# Altium PCB LEDArray8KeyRevB.PcbDoc (part 1 of 4)
Units mm, origin at the board's own origin, x right, y up, seen from the top; angles counter-clockwise.
Board outline 120 x 84.91 mm, 2 copper layers (Top Layer, Bottom Layer); 250 components, 219 nets, 891 pads, 234 vias.
Unrouted connection lines stored in the file: 34.
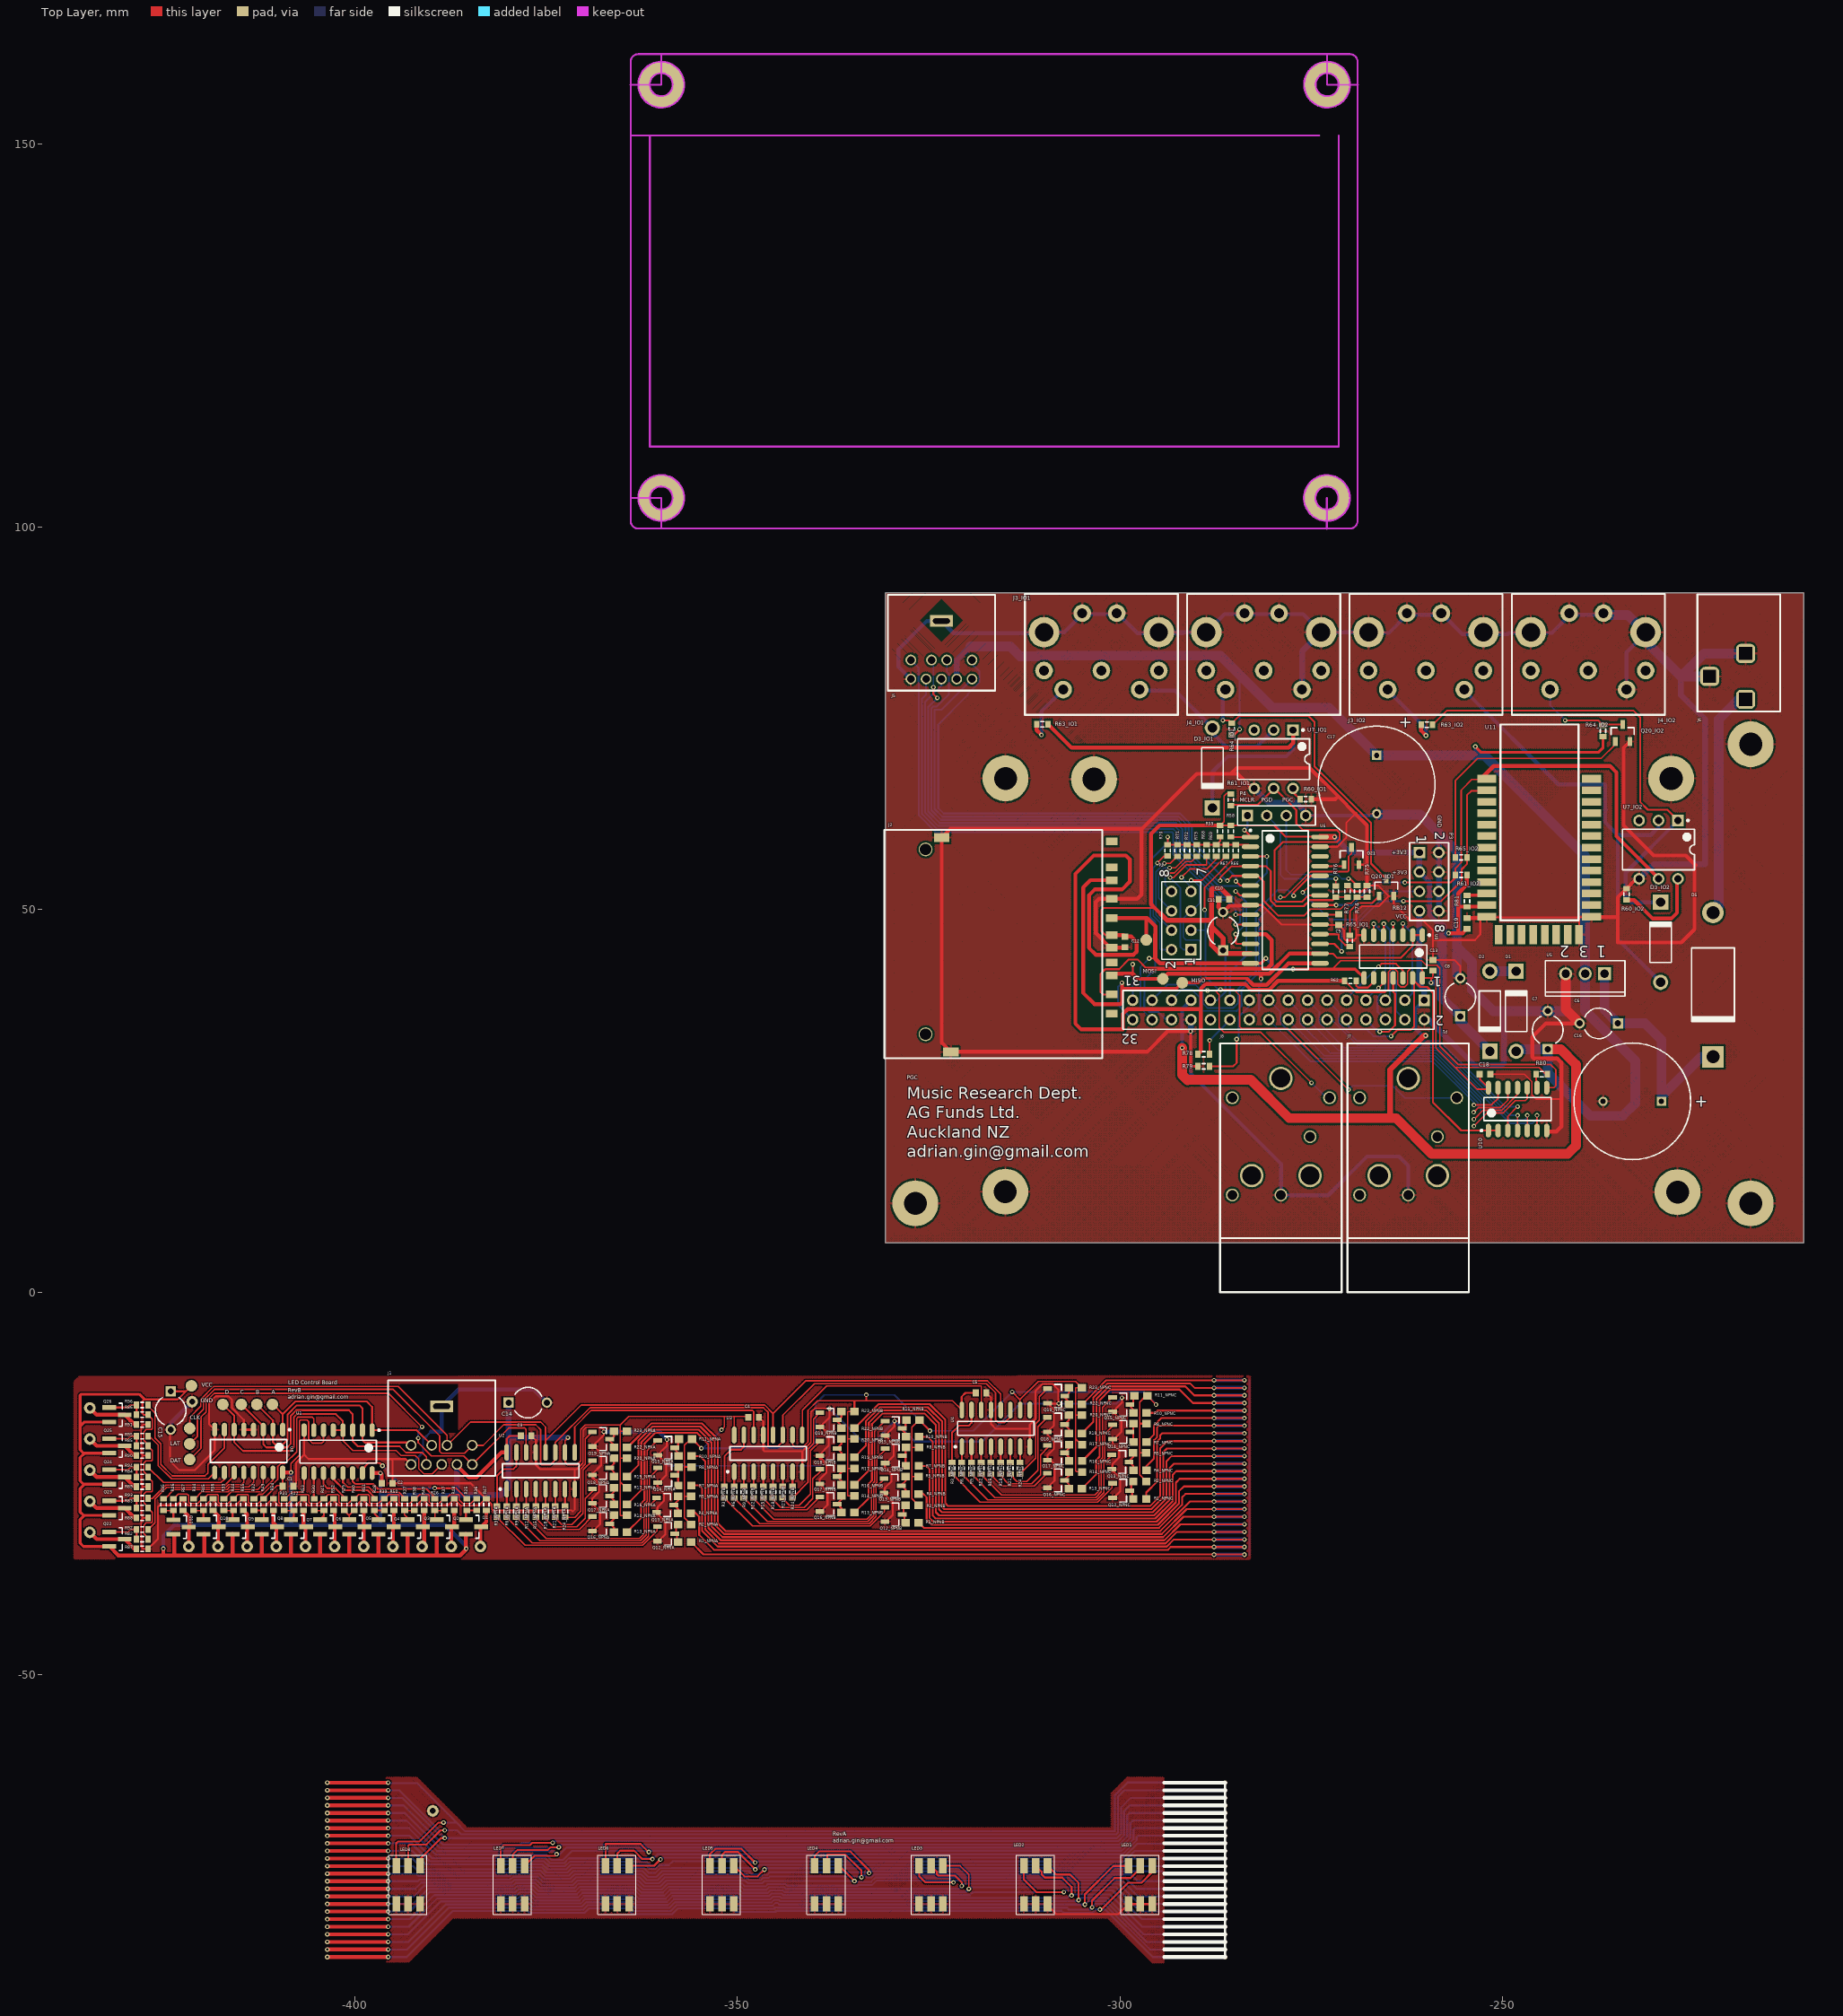
[diagram p0: Top Layer view]
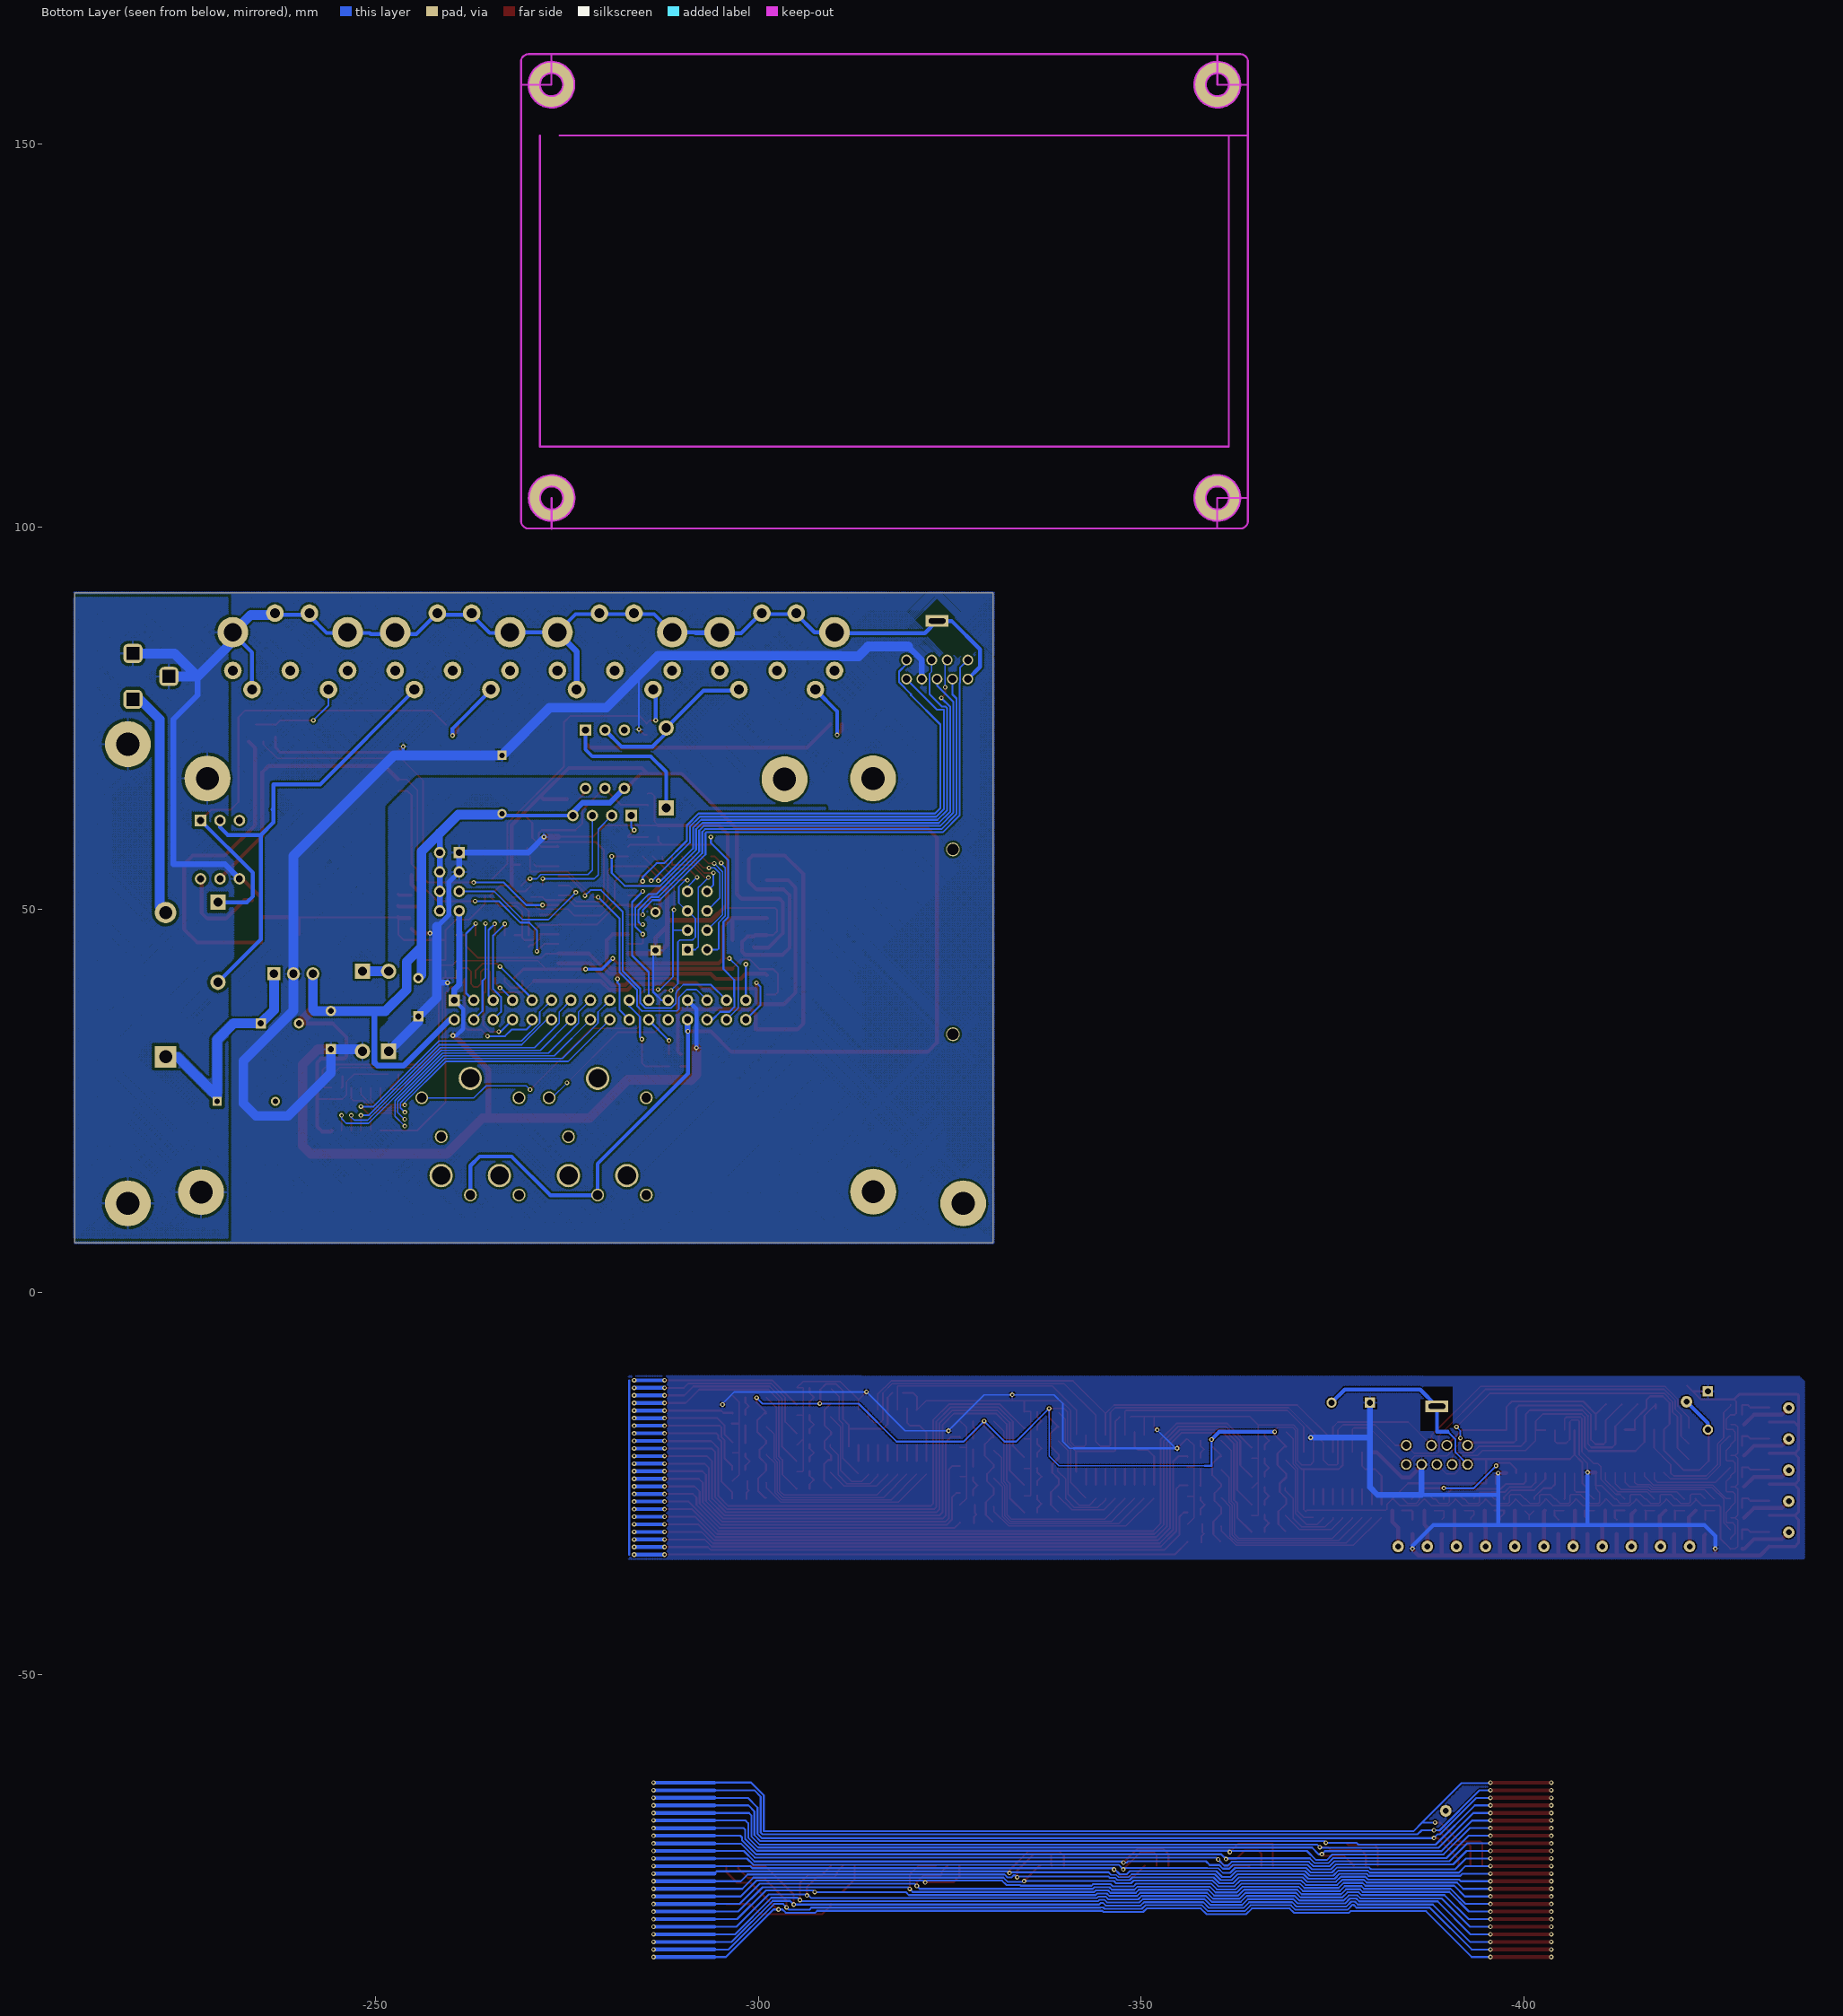
[diagram p1: Bottom Layer view, seen from below]

## Layer stack, top to bottom
Top Layer: signal copper 0.0356
Dielectric: prepreg 0.32, FR-4, Dk 4.8
Bottom Layer: signal copper 0.0356

## Board outline
-330.656,6.485 -210.656,6.485 -210.656,91.398 -330.656,91.398

## Design rules (kind name [scope] priority, off if disabled: settings)
Clearance Clearance_3 [InNamedPolygon('MB_3V3_B') Or  InNamedPolygon('MB_VCC_B') Or  InNamedPolygon('MB_GND_T') Or  InNamedPolygon('MB_VIN_B')] p1: gap=0.254
Clearance Clearance_2 [InNamedPolygon('MB_VCC_B') Or  InNamedPolygon('MB_VIN_B') Or  InNamedPolygon('MB_GND_T') Or  InNamedPolygon('MB_3V3_B')] p2: gap=0.381
Clearance Clearance_1 [InNamedPolygon('Top Layer-No Net') Or  InNamedPolygon('Top Layer-No Net') Or  InNamedPolygon('MB_GND_B') Or  InNamedPolygon('Top Layer-No Net') Or  InNamedPolygon('MB_VCC_B') Or  InNamedPolygon('GNDBOT') Or  InNamedPolygon('MB_3V3_B') Or  InNamedPolygon('tedi') Or  InNamedPolygon('Top Layer-No Net') Or  InNamedPolygon('VCCBOT')] p3: gap=0.381
Clearance [All] p4: gap=0.152
HoleSize [All] p1: absolutevalues=TRUE maxlimit=5.08 minlimit=0.3 maxpercent=80.000 minpercent=20.000
HoleToHoleClearance [All] p1: gap=0.076 allowstackedmicrovias=TRUE
MinimumAnnularRing [All] p1: minimumring=0.102
MinimumSolderMaskSliver [All] p1: minsoldermaskwidth=0.1
PolygonConnect [All] p1: connectstyle=Relief reliefconductorwidth=0.254 reliefentries=4 polygonreliefangle="90 Angle"
RoomDefinition LEDArray [InComponentClass('LEDArray')] p1: confinementstyle=ConfineIn formatcopy=TRUE lockcomponents=FALSE outline -433.742,-34.562 -433.742,-13.698 -426.382,-13.698 -426.382,-11.944 -396.003,-11.944 -396.003,-11.117 -381.241,-11.117 -381.241,-12.065 -373.858,-12.065 -373.858,-12.295 -316.648,-12.295 -316.648,-13.727 -310.664,-13.727 -310.664,-21.835 -340.4,-21.835 -340.4,-25.101 -370.129,-25.101 -370.129,-27.373 -381.742,-27.373 -381.742,-32.953 -419.969,-32.953 -419.969,-32.979 -426.232,-32.979 -426.232,-34.382 -428.334,-34.382 -428.334,-34.562
RoomDefinition IO2 [InComponentClass('IO2')] p2: confinementstyle=ConfineIn formatcopy=TRUE lockcomponents=FALSE outline -270.373,74.959 -270.373,91.521 -228.402,91.521 -228.402,62.734 -224.579,62.734 -224.579,52.954 -232.97,52.954 -232.97,50.498 -234.678,50.498 -234.678,51.284 -238.245,51.284 -238.245,53.688 -256.918,53.688 -256.918,73.3 -261.395,73.3 -261.395,74.959
RoomDefinition PowerSupply [InComponentClass('PowerSupply')] p3: confinementstyle=ConfineIn formatcopy=TRUE lockcomponents=FALSE outline -257.895,35.046 -257.895,42.056 -253.423,42.056 -253.423,43.28 -244.777,43.28 -244.777,45.694 -225.675,45.694 -225.675,51.341 -224.934,51.341 -224.934,91.557 -213.372,91.557 -213.372,75.495 -219.367,75.495 -219.367,29.041 -223.526,29.041 -223.526,16.977 -241.036,16.977 -241.036,30.159 -253.423,30.159 -253.423,35.046
RoomDefinition MainBoard [InComponentClass('MainBoard')] p4: confinementstyle=ConfineIn formatcopy=TRUE lockcomponents=FALSE outline -331.172,30.186 -331.172,60.798 -330.71,60.798 -330.71,91.499 -315.948,91.499 -315.948,74.996 -258.489,74.996 -258.489,74.481 -238.14,74.481 -238.14,45.55 -242.851,45.55 -242.851,19.431 -254.019,19.431 -254.019,-0.369 -287.293,-0.369 -287.293,26.981 -296.655,26.981 -296.655,30.186
RoomDefinition IO1 [InComponentClass('IO1')] p5: confinementstyle=ConfineIn formatcopy=TRUE lockcomponents=FALSE outline -312.803,75.064 -312.803,91.626 -270.832,91.626 -263.139,91.626 -263.139,55.145 -263.139,50.637 -269.109,50.637 -269.109,44.402 -270.817,44.402 -270.817,61.952 -289.68,61.952 -289.68,73.373 -311.64,73.373 -311.64,75.064
RoomDefinition NPNB [InComponentClass('NPNB')] p6: confinementstyle=ConfineIn formatcopy=TRUE lockcomponents=FALSE outline -352.569,-32.707 -322.343,-32.707 -322.343,-13.911 -352.569,-13.911
RoomDefinition NPNC [InComponentClass('NPNC')] p7: confinementstyle=ConfineIn formatcopy=TRUE lockcomponents=FALSE outline -322.83,-29.593 -292.604,-29.593 -292.604,-10.797 -322.83,-10.797
RoomDefinition NPNA [InComponentClass('NPNA')] p8: confinementstyle=ConfineIn formatcopy=TRUE lockcomponents=FALSE outline -382.287,-35.247 -352.061,-35.247 -352.061,-16.451 -382.287,-16.451
RoomDefinition LED1 [InComponentClass('LED1')] p9: confinementstyle=ConfineIn formatcopy=TRUE lockcomponents=FALSE outline -395.864,-81.584 -395.864,-73.226 -294.587,-73.226 -294.587,-81.584
RoutingVias [All] p1: holewidth=0.28 width=0.6 viastyle="Through Hole" minholewidth=0.2 minwidth=0.5 maxholewidth=1.524 maxwidth=1.524
SilkToSilkClearance [All] p1: silktosilkclearance=0.152
SilkscreenOverComponentPads [All] p1: minsilkscreentomaskgap=0.076
SolderMaskExpansion [All] p1: expansion=0.076
Width [All] p1: maxlimit=10 minlimit=0.152 preferedwidth=0.254 minimp=50.000000 maximp=50.000000 favimp=50.000000
23 further rules are at their usual default settings.

## Classes and differential pairs
component class MainBoard: C9 C10 C11 C12 C13 C17 C18 C19 J2 J5 J7 J8 P1 P2 P3 P4 Q21 R58 R59 R62 R66 R67 R68 R69 R70 R71 R72 R73 R74 R75 R76 R77 R78 R79 R80 R81 U6 U9 U10 U11
net class L[1..24]: L1 L2 L3 L4 L5 L6 L7 L8 L9 L10 L11 L12 L13 L14 L15 L16 L17 L18 L19 L20 L21 L22 L23 L24
net class COM[1..8]: COM1 COM2 COM3 COM4 COM5 COM6 COM7 COM8 COM9 COM10 COM11 COM12 COM13 COM14 COM15 COM16
component class LED1: LED1 LED2 LED3 LED4 LED5 LED6 LED7 LED8
channel class NPNTransistorArray: NPNA NPNB NPNC
component class LEDArray: Adrian C1 C2 C3 C4 C5 C14 C15 J1 Q1 Q2 Q3 Q4 Q5 Q6 Q7 Q8 Q9 Q10 Q11 Q22 Q23 Q24 Q25 Q26 R25 R26 R27 R28 R29 R30 R31 R32 R33 R34 R35 R36 R37 R38 R39 R40 R41 R42 R43 R44 R45 R46 R47 R48 R49 R50 R51 R52 R53 R54 R55 R56 R57 R82 R83 R84 R85 R86 R87 R88 R89 R90 R91 R92 R93 R94 R95 R96 U1 U2 U3 U4 U8
component class NPNA: Q12_NPNA Q13_NPNA Q14_NPNA Q15_NPNA Q16_NPNA Q17_NPNA Q18_NPNA Q19_NPNA R1_NPNA R2_NPNA R3_NPNA R4_NPNA R5_NPNA R6_NPNA R7_NPNA R8_NPNA R9_NPNA R10_NPNA R11_NPNA R12_NPNA R13_NPNA R14_NPNA R15_NPNA R16_NPNA R17_NPNA R18_NPNA R19_NPNA R20_NPNA R21_NPNA R22_NPNA R23_NPNA R24_NPNA
component class NPNB: Q12_NPNB Q13_NPNB Q14_NPNB Q15_NPNB Q16_NPNB Q17_NPNB Q18_NPNB Q19_NPNB R1_NPNB R2_NPNB R3_NPNB R4_NPNB R5_NPNB R6_NPNB R7_NPNB R8_NPNB R9_NPNB R10_NPNB R11_NPNB R12_NPNB R13_NPNB R14_NPNB R15_NPNB R16_NPNB R17_NPNB R18_NPNB R19_NPNB R20_NPNB R21_NPNB R22_NPNB R23_NPNB R24_NPNB
component class NPNC: Q12_NPNC Q13_NPNC Q14_NPNC Q15_NPNC Q16_NPNC Q17_NPNC Q18_NPNC Q19_NPNC R1_NPNC R2_NPNC R3_NPNC R4_NPNC R5_NPNC R6_NPNC R7_NPNC R8_NPNC R9_NPNC R10_NPNC R11_NPNC R12_NPNC R13_NPNC R14_NPNC R15_NPNC R16_NPNC R17_NPNC R18_NPNC R19_NPNC R20_NPNC R21_NPNC R22_NPNC R23_NPNC R24_NPNC
component class PowerSupply: C6 C7 C8 C16 D1 D2 D5 J6 U5
component class IO1: D3_IO1 J3_IO1 J4_IO1 Q20_IO1 R60_IO1 R61_IO1 R63_IO1 R64_IO1 R65_IO1 U7_IO1
component class IO2: D3_IO2 J3_IO2 J4_IO2 Q20_IO2 R60_IO2 R61_IO2 R63_IO2 R64_IO2 R65_IO2 U7_IO2
channel class MIDIInterface: 1 2
net class RX[1..2]: RX1 RX2
net class TX[1..2]: TX1 TX2

## Components (designator, comment, footprint, x,y, rotation, side; value= is the part's Value field where it differs from the comment)
C1 "Cap Semi" 1608[0603] -408.703,-25.341 r0 top
C2 "Cap Semi" 1608[0603] -395.749,-24.96 r0 top
C3 "Cap Semi" 1608[0603] -377.588,-18.747 r180 top
C4 "Cap Semi" 1608[0603] -347.87,-16.324 r180 top
C5 "Cap Semi" 1608[0603] -318.152,-13.149 r180 top
C6 "Cap2" CAPR5-4X5 -237.445,35.138 r180 top
C7 "Cap2" CAPR5-4X5 -244.111,34.255 r90 top
C8 "Cap2" CAPR5-4X5 -255.541,38.551 r90 top
C9 "Cap Semi" 1608[0603] -271.416,48.7 r90 top
C10 "Cap Semi" 1608[0603] -286.402,51.367 r0 top
C11 "Cap2" CAPR5-4X5 -286.529,47.176 r90 top
C12 "Cap Semi" 1608[0603] -299.356,45.779 r90 top
C13 "Cap Semi" 1608[0603] -259.097,42.731 r270 top
C14 "Cap2" CAPR5-4X5 -377.363,-14.419 r0 top
C15 "Cap2" CAPR5-4X5 -424.028,-15.449 r270 top
C16 "Cap Pol1" RB7.6-15 -233.062,24.951 r0 top
C17 "Cap Pol1" RB7.6-15 -266.463,66.353 r90 top
C18 "Cap Semi" 1608[0603] -252.315,28.507 r180 top
C19 "Cap Semi" 1608[0603] -254.652,48.192 r270 top
D1 "Diode 1N4004" DO-41 -248.24,36.72 r90 top
D2 "Diode 1N4004" DO-41 -251.669,36.72 r270 top
D3_IO1 "Diode 1N4004" DO-41 -287.926,68.512 r270 top (schematic designator D3)
D3_IO2 "Diode 1N4004" DO-41 -229.362,45.738 r90 top (schematic designator D3)
D5 "5A Diode" DO-201AD -222.521,40.191 r270 top
J1 "Mini DIN9 Socket" 9MINIDIN -395.622,-11.498 r0 top
J2 "SDCard_SMD" SDCARD -325.391,45.017 r90 top
J3_IO1 "DIN5 Socket" DIN-5 -312.422,91.245 r0 top (schematic designator J3)
J3_IO2 "DIN5 Socket" DIN-5 -270.019,91.245 r0 top (schematic designator J3)
J4_IO1 "DIN5 Socket" DIN-5 -291.213,91.245 r0 top (schematic designator J4)
J4_IO2 "DIN5 Socket" DIN-5 -248.81,91.245 r0 top (schematic designator J4)
J5 "Mini DIN9 Socket" 9MINIDIN -330.329,91.118 r0 top
J6 "PWR2.5" PJ-102B -222.953,80.476 r0 top
J7 "Phonejack2" RN111PC -262.337,7.073 r0 top
J8 "Phonejack2" RN111PC -278.974,7.073 r0 top
LED1 "5050RGBLED" "5050 CRGBLED" -297.341,-77.43 r90 top
LED2 "5050RGBLED" "5050 CRGBLED" -311.008,-77.43 r90 top
LED3 "5050RGBLED" "5050 CRGBLED" -324.675,-77.43 r90 top
LED4 "5050RGBLED" "5050 CRGBLED" -338.342,-77.43 r90 top
LED5 "5050RGBLED" "5050 CRGBLED" -352.009,-77.43 r90 top
LED6 "5050RGBLED" "5050 CRGBLED" -365.676,-77.43 r90 top
LED7 "5050RGBLED" "5050 CRGBLED" -379.343,-77.43 r90 top
LED8 "5050RGBLED" "5050 CRGBLED" -393.01,-77.43 r90 top
P1 "Header 16X2" HDR2X16 -260.24,38.159 r180 top
P2 "Header 4X2" HDR2X4 -290.72,44.763 r90 top
P3 "Header 4X2" HDR2X4 -260.875,57.463 r270 top
P4 "Header 4" HDR1X4 -283.354,62.289 r0 top
Q1 "BC807" SOT23-3M -384.446,-30.649 r0 top
Q2 "BC807" SOT23-3M -388.256,-30.649 r0 top (schematic designator Q1)
Q3 "BC807" SOT23-3M -392.066,-30.649 r0 top (schematic designator Q1)
Q4 "BC807" SOT23-3M -395.876,-30.649 r0 top (schematic designator Q1)
Q5 "BC807" SOT23-3M -399.686,-30.649 r0 top (schematic designator Q1)
Q6 "BC807" SOT23-3M -403.496,-30.649 r0 top (schematic designator Q1)
Q7 "BC807" SOT23-3M -407.306,-30.649 r0 top (schematic designator Q1)
Q8 "BC807" SOT23-3M -411.116,-30.649 r0 top (schematic designator Q1)
Q9 "BC807" SOT23-3M -414.926,-30.649 r0 top (schematic designator Q1)
Q10 "BC807" SOT23-3M -418.736,-30.649 r0 top (schematic designator Q1)
Q11 "BC807" SOT23-3M -422.673,-30.675 r0 top
Q12_NPNA "NPN" SOT95P230-3N -359.3,-31.564 r0 top (schematic designator Q12)
Q12_NPNB "NPN" SOT95P230-3N -329.582,-29.024 r0 top (schematic designator Q12)
Q12_NPNC "NPN" SOT95P230-3N -299.843,-25.91 r0 top (schematic designator Q12)
Q13_NPNA "NPN" SOT95P230-3N -359.409,-27.82 r0 top (schematic designator Q13)
Q13_NPNB "NPN" SOT95P230-3N -329.691,-25.28 r0 top (schematic designator Q13)
Q13_NPNC "NPN" SOT95P230-3N -299.952,-22.166 r0 top (schematic designator Q13)
Q14_NPNA "NPN" SOT95P230-3N -359.282,-23.905 r0 top (schematic designator Q14)
Q14_NPNB "NPN" SOT95P230-3N -329.564,-21.365 r0 top (schematic designator Q14)
Q14_NPNC "NPN" SOT95P230-3N -299.825,-18.251 r0 top (schematic designator Q14)
Q15_NPNA "NPN" SOT95P230-3N -359.282,-20.327 r0 top (schematic designator Q15)
Q15_NPNB "NPN" SOT95P230-3N -329.564,-17.787 r0 top (schematic designator Q15)
Q15_NPNC "NPN" SOT95P230-3N -299.825,-14.673 r0 top (schematic designator Q15)
Q16_NPNA "NPN" SOT95P230-3N -367.809,-30.243 r0 top (schematic designator Q16)
Q16_NPNB "NPN" SOT95P230-3N -338.091,-27.703 r0 top (schematic designator Q16)
Q16_NPNC "NPN" SOT95P230-3N -308.352,-24.589 r0 top (schematic designator Q16)
Q17_NPNA "NPN" SOT95P230-3N -367.809,-26.621 r0 top (schematic designator Q17)
Q17_NPNB "NPN" SOT95P230-3N -338.091,-24.081 r0 top (schematic designator Q17)
Q17_NPNC "NPN" SOT95P230-3N -308.352,-20.967 r0 top (schematic designator Q17)
Q18_NPNA "NPN" SOT95P230-3N -367.809,-22.938 r0 top (schematic designator Q18)
Q18_NPNB "NPN" SOT95P230-3N -338.091,-20.398 r0 top (schematic designator Q18)
Q18_NPNC "NPN" SOT95P230-3N -308.352,-17.284 r0 top (schematic designator Q18)
Q19_NPNA "NPN" SOT95P230-3N -367.791,-19.194 r0 top (schematic designator Q19)
Q19_NPNB "NPN" SOT95P230-3N -338.073,-16.654 r0 top (schematic designator Q19)
Q19_NPNC "NPN" SOT95P230-3N -308.334,-13.54 r0 top (schematic designator Q19)
Q20_IO1 "NPN" SOT95P230-3N -265.193,52.891 r90 top (schematic designator Q20)
Q20_IO2 "NPN" SOT95P230-3N -234.332,73.084 r90 top (schematic designator Q20)
Q21 "NPN" SOT95P230-3N -269.748,56.991 r90 top
Q22 "BC807" SOT23-3M -431.038,-32.258 r0 top
Q23 "BC807" SOT23-3M -431.038,-28.194 r0 top
Q24 "BC807" SOT23-3M -431.038,-24.13 r0 top
Q25 "BC807" SOT23-3M -431.038,-20.066 r0 top
Q26 "BC807" SOT23-3M -431.038,-16.002 r0 top
R1_NPNA "Res3" J1-0603#1 -356.869,-32.646 r180 top (schematic designator R1)
R1_NPNB "Res3" J1-0603#1 -327.151,-30.106 r180 top (schematic designator R1)
R1_NPNC "Res3" J1-0603#1 -297.412,-26.992 r180 top (schematic designator R1)
R2_NPNA "Res3" J1-0603#1 -356.869,-30.36 r180 top (schematic designator R2)
R2_NPNB "Res3" J1-0603#1 -327.151,-27.82 r180 top (schematic designator R2)
R2_NPNC "Res3" J1-0603#1 -297.412,-24.706 r180 top (schematic designator R2)
R3_NPNA "Res3" J1-0603#2 -381.398,-28.653 r270 top (schematic designator R3)
R3_NPNB "Res3" J1-0603#2 -351.68,-26.113 r270 top (schematic designator R3)
R3_NPNC "Res3" J1-0603#2 -321.941,-22.999 r270 top (schematic designator R3)
R4_NPNA "Res3" J1-0603#1 -356.912,-28.897 r180 top (schematic designator R4)
R4_NPNB "Res3" J1-0603#1 -327.169,-26.357 r180 top (schematic designator R4)
R4_NPNC "Res3" J1-0603#1 -297.4,-23.233 r180 top (schematic designator R4)
R5_NPNA "Res3" J1-0603#1 -356.887,-26.638 r180 top (schematic designator R5)
R5_NPNB "Res3" J1-0603#1 -327.169,-24.098 r180 top (schematic designator R5)
R5_NPNC "Res3" J1-0603#1 -297.43,-20.984 r180 top (schematic designator R5)
R6_NPNA "Res3" J1-0603#2 -380.128,-28.653 r270 top (schematic designator R6)
R6_NPNB "Res3" J1-0603#2 -350.41,-26.113 r270 top (schematic designator R6)
R6_NPNC "Res3" J1-0603#2 -320.671,-22.999 r270 top (schematic designator R6)
R7_NPNA "Res3" J1-0603#1 -356.843,-25.23 r180 top (schematic designator R7)
R7_NPNB "Res3" J1-0603#1 -327.125,-22.69 r180 top (schematic designator R7)
R7_NPNC "Res3" J1-0603#1 -297.386,-19.576 r180 top (schematic designator R7)
R8_NPNA "Res3" J1-0603#1 -356.834,-22.822 r180 top (schematic designator R8)
R8_NPNB "Res3" J1-0603#1 -327.116,-20.282 r180 top (schematic designator R8)
R8_NPNC "Res3" J1-0603#1 -297.377,-17.168 r180 top (schematic designator R8)
R9_NPNA "Res3" J1-0603#2 -378.858,-28.653 r270 top (schematic designator R9)
R9_NPNB "Res3" J1-0603#2 -349.14,-26.113 r270 top (schematic designator R9)
R9_NPNC "Res3" J1-0603#2 -319.401,-22.999 r270 top (schematic designator R9)
R10_NPNA "Res3" J1-0603#1 -356.832,-21.407 r180 top (schematic designator R10)
R10_NPNB "Res3" J1-0603#1 -327.114,-18.867 r180 top (schematic designator R10)
R10_NPNC "Res3" J1-0603#1 -297.375,-15.753 r180 top (schematic designator R10)
R11_NPNA "Res3" J1-0603#1 -356.742,-19.184 r180 top (schematic designator R11)
R11_NPNB "Res3" J1-0603#1 -327.042,-16.679 r180 top (schematic designator R11)
R11_NPNC "Res3" J1-0603#1 -297.285,-13.53 r180 top (schematic designator R11)
R12_NPNA "Res3" J1-0603#2 -377.588,-28.653 r270 top (schematic designator R12)
R12_NPNB "Res3" J1-0603#2 -347.87,-26.113 r270 top (schematic designator R12)
R12_NPNC "Res3" J1-0603#2 -318.131,-22.999 r270 top (schematic designator R12)
R13_NPNA "Res3" J1-0603#1 -365.269,-31.32 r180 top (schematic designator R13)
R13_NPNB "Res3" J1-0603#1 -335.551,-28.78 r180 top (schematic designator R13)
R13_NPNC "Res3" J1-0603#1 -305.812,-25.666 r180 top (schematic designator R13)
R14_NPNA "Res3" J1-0603#1 -365.256,-29.137 r180 top (schematic designator R14)
R14_NPNB "Res3" J1-0603#1 -335.538,-26.597 r180 top (schematic designator R14)
R14_NPNC "Res3" J1-0603#1 -305.799,-23.483 r180 top (schematic designator R14)
R15_NPNA "Res3" J1-0603#2 -376.318,-28.653 r270 top (schematic designator R15)
R15_NPNB "Res3" J1-0603#2 -346.6,-26.113 r270 top (schematic designator R15)
R15_NPNC "Res3" J1-0603#2 -316.861,-22.999 r270 top (schematic designator R15)
R16_NPNA "Res3" J1-0603#1 -365.251,-27.703 r180 top (schematic designator R16)
R16_NPNB "Res3" J1-0603#1 -335.533,-25.163 r180 top (schematic designator R16)
R16_NPNC "Res3" J1-0603#1 -305.794,-22.049 r180 top (schematic designator R16)
R17_NPNA "Res3" J1-0603#1 -365.251,-25.544 r180 top (schematic designator R17)
R17_NPNB "Res3" J1-0603#1 -335.533,-23.004 r180 top (schematic designator R17)
R17_NPNC "Res3" J1-0603#1 -305.794,-19.89 r180 top (schematic designator R17)
R18_NPNA "Res3" J1-0603#2 -375.048,-28.653 r270 top (schematic designator R18)
R18_NPNB "Res3" J1-0603#2 -345.33,-26.113 r270 top (schematic designator R18)
R18_NPNC "Res3" J1-0603#2 -315.591,-22.999 r270 top (schematic designator R18)
R19_NPNA "Res3" J1-0603#1 -365.269,-24.081 r180 top (schematic designator R19)
R19_NPNB "Res3" J1-0603#1 -335.551,-21.541 r180 top (schematic designator R19)
R19_NPNC "Res3" J1-0603#1 -305.812,-18.427 r180 top (schematic designator R19)
R20_NPNA "Res3" J1-0603#1 -365.269,-21.695 r180 top (schematic designator R20)
R20_NPNB "Res3" J1-0603#1 -335.551,-19.155 r180 top (schematic designator R20)
R20_NPNC "Res3" J1-0603#1 -305.812,-16.041 r180 top (schematic designator R20)
R21_NPNA "Res3" J1-0603#2 -373.778,-28.653 r270 top (schematic designator R21)
R21_NPNB "Res3" J1-0603#2 -344.06,-26.113 r270 top (schematic designator R21)
R21_NPNC "Res3" J1-0603#2 -314.321,-22.999 r270 top (schematic designator R21)
R22_NPNA "Res3" J1-0603#1 -365.269,-20.261 r180 top (schematic designator R22)
R22_NPNB "Res3" J1-0603#1 -335.551,-17.746 r180 top (schematic designator R22)
R22_NPNC "Res3" J1-0603#1 -305.812,-14.622 r180 top (schematic designator R22)
R23_NPNA "Res3" J1-0603#1 -365.269,-18.139 r180 top (schematic designator R23)
R23_NPNB "Res3" J1-0603#1 -335.551,-15.599 r180 top (schematic designator R23)
R23_NPNC "Res3" J1-0603#1 -305.812,-12.485 r180 top (schematic designator R23)
R24_NPNA "Res3" J1-0603#2 -372.508,-28.653 r270 top (schematic designator R24)
R24_NPNB "Res3" J1-0603#2 -342.79,-26.113 r270 top (schematic designator R24)
R24_NPNC "Res3" J1-0603#2 -313.051,-22.999 r270 top (schematic designator R24)
R25 "Res3" J1-0603#2 -385.335,-27.754 r270 top
R26 "Res3" J1-0603#2 -389.526,-27.754 r270 top
R27 "Res3" J1-0603#2 -393.463,-27.754 r270 top
R28 "Res3" J1-0603#2 -397.4,-27.754 r270 top
R29 "Res3" J1-0603#2 -401.337,-27.754 r270 top
R30 "Res3" J1-0603#2 -405.274,-27.754 r270 top
R31 "Res3" J1-0603#2 -409.211,-27.754 r270 top
R32 "Res3" J1-0603#2 -413.148,-27.754 r270 top
R33 "Res3" J1-0603#2 -417.085,-27.754 r270 top
R34 "Res3" J1-0603#2 -421.022,-27.754 r270 top
R35 "Res3" J1-0603#2 -424.959,-27.754 r270 top
R36 "Res3" J1-0603#2 -384.065,-27.754 r270 top
R37 "Res3" J1-0603#2 -388.256,-27.754 r270 top
R38 "Res3" J1-0603#2 -392.193,-27.754 r270 top
R39 "Res3" J1-0603#2 -396.13,-27.754 r270 top
R40 "Res3" J1-0603#2 -400.067,-27.754 r270 top
R41 "Res3" J1-0603#2 -404.004,-27.754 r270 top
R42 "Res3" J1-0603#2 -407.941,-27.754 r270 top
R43 "Res3" J1-0603#2 -411.878,-27.754 r270 top
R44 "Res3" J1-0603#2 -415.815,-27.754 r270 top
R45 "Res3" J1-0603#2 -419.752,-27.754 r270 top
R46 "Res3" J1-0603#2 -423.689,-27.754 r270 top
R47 "Res3" J1-0603#2 -382.795,-27.754 r270 top
R48 "Res3" J1-0603#2 -386.986,-27.754 r270 top
R49 "Res3" J1-0603#2 -390.923,-27.754 r270 top
R50 "Res3" J1-0603#2 -394.86,-27.754 r270 top
R51 "Res3" J1-0603#2 -398.797,-27.754 r270 top
R52 "Res3" J1-0603#2 -402.734,-27.754 r270 top
R53 "Res3" J1-0603#2 -406.671,-27.754 r270 top
R54 "Res3" J1-0603#2 -410.608,-27.754 r270 top
R55 "Res3" J1-0603#2 -414.545,-27.754 r270 top
R56 "Res3" J1-0603#2 -418.482,-27.754 r270 top
R57 "Res3" J1-0603#2 -422.419,-27.754 r270 top
R58 "Res3" J1-0603#2 -285.513,60.257 r90 top
R59 "Res3" J1-0603#2 -286.91,60.257 r90 top
R60_IO1 "Res3" J1-0603#2 -275.734,64.448 r0 top (schematic designator R60)
R60_IO2 "Res3" J1-0603#2 -233.824,52.002 r90 top (schematic designator R60)
R61_IO1 "Res3" J1-0603#2 -285.513,64.351 r90 top (schematic designator R61)
R61_IO2 "Res3" J1-0603#2 -255.414,54.542 r0 top (schematic designator R61)
R62 "Res3" J1-0603#2 -269.892,40.699 r180 top
R63_IO1 "Res3" J1-0603#2 -310.136,74.227 r0 top (schematic designator R63)
R63_IO2 "Res3" J1-0603#2 -259.891,74.154 r0 top (schematic designator R63)
R64_IO1 "Res3" J1-0603#2 -285.386,73.592 r270 top (schematic designator R64)
R64_IO2 "Res3" J1-0603#2 -236.884,73.338 r270 top (schematic designator R64)
R65_IO1 "Res3" J1-0603#2 -269.963,45.906 r270 top (schematic designator R65)
R65_IO2 "Res3" J1-0603#2 -255.414,56.828 r0 top (schematic designator R65)
R66 "Res3" J1-0603#2 -284.856,57.737 r90 top
R67 "Res3" J1-0603#2 -286.148,57.717 r90 top
R68 "Res3" J1-0603#2 -288.688,57.729 r270 top
R69 "Res3" J1-0603#2 -287.418,57.729 r90 top
R70 "Res3" J1-0603#2 -293.768,57.743 r270 top
R71 "Res3" J1-0603#2 -292.498,57.729 r270 top
R72 "Res3" J1-0603#2 -291.228,57.729 r270 top
R73 "Res3" J1-0603#2 -289.958,57.729 r270 top
R74 "Res3" J1-0603#2 -269.003,52.371 r270 top
R75 "Res3" J1-0603#2 -267.733,52.383 r270 top
R76 "Res3" J1-0603#2 -271.797,52.358 r270 top
R77 "Res3" J1-0603#2 -270.273,52.371 r270 top
R78 "Res3" J1-0603#2 -289.071,31.105 r180 top
R79 "Res3" J1-0603#2 -289.071,29.523 r0 top
R80 "Res3" J1-0603#2 -244.898,28.507 r0 top
R81 "Res3" J1-0603#2 -254.652,51.113 r90 top
R82 "Res3" J1-0603#2 -427.736,-32.258 r180 top
R83 "Res3" J1-0603#2 -427.736,-28.194 r180 top
R84 "Res3" J1-0603#2 -427.736,-24.13 r180 top
R85 "Res3" J1-0603#2 -427.736,-20.066 r180 top
R86 "Res3" J1-0603#2 -427.736,-16.002 r180 top
R87 "Res3" J1-0603#2 -427.736,-33.528 r180 top
R88 "Res3" J1-0603#2 -427.736,-29.464 r180 top
R89 "Res3" J1-0603#2 -427.736,-25.4 r180 top
R90 "Res3" J1-0603#2 -427.736,-21.336 r180 top
R91 "Res3" J1-0603#2 -427.736,-17.272 r180 top
R92 "Res3" J1-0603#2 -427.736,-30.988 r180 top
R93 "Res3" J1-0603#2 -427.736,-26.924 r180 top
R94 "Res3" J1-0603#2 -427.736,-22.86 r180 top
R95 "Res3" J1-0603#2 -427.736,-18.796 r180 top
R96 "Res3" J1-0603#2 -427.736,-14.732 r180 top
U1 "SN54HC138M" SOIC127P602-16BM -402.15,-20.82 r270 top
U2 "SN74HC595D" D016_N -375.683,-23.319 r90 top
U3 "SN74HC595D" D016_N -345.954,-21.047 r90 top
U4 "SN74HC595D" D016_N -316.218,-17.781 r90 top
U5 "LM323T" TO220ABN -239.223,41.615 r180 top
U6 "PIC24HJ64GP202-I/SO" SOIC-SO28_N -278.401,51.24 r0 top
U7_IO1 "4N25" DIP-6 -279.925,69.655 r270 top (schematic designator U7)
U7_IO2 "4N25" DIP-6 -229.633,57.844 r270 top (schematic designator U7)
U8 "SN54HC138M" SOIC127P602-16BM -413.834,-20.743 r270 top
U9 "SN74HC164M" SOIC127P600-14AM -264.304,43.874 r270 top
U10 "SN74HC164M" SOIC127P600-14AM -248.055,23.935 r90 top
U11 "HC-07 Bluetooth Module" BTMODULE -251.779,74.198 r0 top

## Footprints (in the part's own frame and the unit in brackets; to place one, negate y for a bottom-side part, rotate by r counter-clockwise, add the part's x,y. Pads: shape width x height; smd on the part's side, far side on the other; paste and mask are expansions set on the pad)
9MINIDIN [mm] "CUI Inc. MD-90S"
  round 1.4 hole 1: 1(5.7,-8.5) 2(7.7,-8.5) 3(3,-8.5) 4(5,-11) 5(7,-11) 6(11,-8.5) 7(3,-11) 8(9,-11) 9(11,-11)
  rect 3x1.5 hole 2.2 slot 0.7 at 90 deg: C(7,-3.4)
  silkscreen extent 0,-12.5 14,0
1608[0603] [mm] "Chip Capacitor, Body 1.6x0.8mm, IPC High Density"
  rect 0.8x0.9 smd: 1(-0.7,0) 2(0.7,0)
  body extent -0.87,-0.48 0.87,0.48, height 1.3
"5050 CRGBLED" [mm] "5050 RGBLED"
  rect 2x1 smd: 1(-2.5,1.55) 2(2.5,1.55) 3(-2.5,0) 4(2.5,0) 5(-2.5,-1.55) 6(2.5,-1.55)
  silkscreen extent -3.85,-2.45 3.9,2.55
BTMODULE [mm] "HC-07 Bluetooth UART"
  rect 2.5x1 smd: 1(-0.3,-7.1) 2(-0.3,-8.6) 3(-0.3,-10.1) 4(-0.3,-11.6) 5(-0.3,-13.1) 6(-0.3,-14.6) 7(-0.3,-16.1) 8(-0.3,-17.6) 9(-0.3,-19.1) 10(-0.3,-20.6) 11(-0.3,-22.1) 12(-0.3,-23.6) 13(-0.3,-25.1) 22(13.4,-25.1) 23(13.4,-23.6) 24(13.4,-22.1) 25(13.4,-20.6) 26(13.4,-19.1) 27(13.4,-17.6) 28(13.4,-16.1) 29(13.4,-14.6) 30(13.4,-13.1) 31(13.4,-11.6) 32(13.4,-10.1) 33(13.4,-8.6) 34(13.4,-7.1)
  rect 1x2.5 smd: 14(1.27,-27.47) 15(2.77,-27.47) 16(4.27,-27.47) 17(5.77,-27.47) 18(7.27,-27.47) 19(8.77,-27.47) 20(10.27,-27.47) 21(11.77,-27.47)
  silkscreen extent 1.5,-25.6 11.7,0
CAPR5-4X5 [mm] "Capacitor; 2 Leads"
  rect 1.35x1.35 hole 0.8: 1(-2.5,0)
  round 1.35 hole 0.8: 2(2.5,0)
  silkscreen extent -1.69,-2 1.82,2
D016_N [mm] "SOIC, 16-Leads, Body 9.9x3.9mm, Pitch 1.27mm, IPC Medium Density"
  oval 2.2x0.6 smd: 1(-2.4,4.445) 2(-2.4,3.175) 3(-2.4,1.905) 4(-2.4,0.635) 5(-2.4,-0.635) 6(-2.4,-1.905) 7(-2.4,-3.175) 8(-2.4,-4.445) 9(2.4,-4.445) 10(2.4,-3.175) 11(2.4,-1.905) 12(2.4,-0.635) 13(2.4,0.635) 14(2.4,1.905) 15(2.4,3.175) 16(2.4,4.445)
  silkscreen extent -2.52,-5 0.9,5.42, body extent -1.95,-4.95 1.95,4.95, height 1.75
DIN-5 [mm] "CUI Inc. SDS-50J"
  round 2.3 hole 1.3: 1(2.5,-10) 2(10,-10) 3(17.5,-10) 4(5,-12.5) 5(15,-12.5) C(7.5,-2.5) C(12,-2.5)
  round 4 hole 2.4: C(2.5,-5) C(17.5,-5)
  silkscreen extent 0,-15.8 20,0
DIP-6 [mm] "DIP; 6 Leads; Row Spacing 7.62 mm; Pitch 2.54 mm"
  rect 1.5x1.5 hole 0.9: 1(-3.81,2.54)
  round 1.5 hole 0.9: 2(-3.81,0) 3(-3.81,-2.54) 4(3.81,-2.54) 5(3.81,0) 6(3.81,2.54)
  silkscreen extent -3.93,-4.7 2.65,4.7, body extent -3.55,-4.7 3.55,4.7, height 5.46
DO-41 [mm] "Diode, Axial; Body 5.2 x 2.7 mm (LxDia. max), Lead Dia. 0.86 mm (max)"
  round 2 hole 1.2: 1(-5.23,0)
  rect 2x2 hole 1.2: 2(5.23,0)
  silkscreen extent -2.65,-1.4 2.75,1.4
DO-201AD [mm] "Diode, Axial; Body 9.5 x 5.6 mm (LxDia. max), Lead Dia. 1.32 mm (max)"
  round 2.8 hole 1.7: 1(-9.42,0)
  rect 2.8x2.8 hole 1.7: 2(9.42,0)
  silkscreen extent -4.8,-2.8 4.9,2.8
HDR1X4 [mm] "Connector; Header; 4 Position"
  rect 1.5x1.5 hole 0.9: 1(0,0)
  round 1.5 hole 0.9: 2(2.54,0) 3(5.08,0) 4(7.62,0)
  silkscreen extent -1.27,-1.27 8.89,1.27
HDR2X4 [mm] "Connector; Header; 4x2 Position"
  rect 1.5x1.5 hole 0.9: 1(0,0)
  round 1.5 hole 0.9: 2(0,2.54) 3(2.54,0) 4(2.54,2.54) 5(5.08,0) 6(5.08,2.54) 7(7.62,0) 8(7.62,2.54)
  silkscreen extent -1.27,-1.27 8.89,3.81
HDR2X16 [mm] "Connector; Header; 16x2 Position"
  rect 1.5x1.5 hole 0.9: 1(0,0)
  round 1.5 hole 0.9: 2(0,2.54) 3(2.54,0) 4(2.54,2.54) 5(5.08,0) 6(5.08,2.54) 7(7.62,0) 8(7.62,2.54) 9(10.16,0) 10(10.16,2.54) 11(12.7,0) 12(12.7,2.54) 13(15.24,0) 14(15.24,2.54) 15(17.78,0) 16(17.78,2.54) 17(20.32,0) 18(20.32,2.54) 19(22.86,0) 20(22.86,2.54) 21(25.4,0) 22(25.4,2.54) 23(27.94,0) 24(27.94,2.54) 25(30.48,0) 26(30.48,2.54) 27(33.02,0) 28(33.02,2.54) 29(35.56,0) 30(35.56,2.54) 31(38.1,0) 32(38.1,2.54)
  silkscreen extent -1.27,-1.27 39.37,3.81
J1-0603#1 [mm] "Chip Resistor; Body 1.6 x 0.8 mm (LxW typ)"
  rect 1.1x1 smd: 1(-0.85,0) 2(0.85,0)
J1-0603#2 [mm] "Chip Resistor, Body 1.6x0.8mm, IPC High Density"
  rect 0.7x0.9 smd: 1(-0.75,0) 2(0.75,0)
  silkscreen extent -0.2,-0.35 0.2,0.35, body extent -0.85,-0.48 0.85,0.48, height 0.9
PJ-102B [mm] "CUI Inc. PJ-102B"
  rrect50% 2.5x2.5 hole 1.65 square: 1(4.7,-3) 2(4.7,3) 3(0,0)
  silkscreen extent -1.6,-4.6 9.2,10.7
RB7.6-15 [mm] "Polarized Capacitor (Radial); 2 Leads"
  rect 1.2x1.2 hole 0.7: 1(3.81,0)
  round 1.2 hole 0.7: 2(-3.81,0)
  silkscreen extent -7.62,-7.62 7.62,7.62
RN111PC [mil] "Switchcraft RN-111PC"
  round 120 hole 95: MNT(-150,322) MNT(0,822) MNT(150,322)
  round 66 hole 50: RING(-250,222) RING_SH(-250,722) SLEEVE(0,222) TIP(250,722) TIP_SH(150,522)
  silkscreen extent -312,-278 312,1002
SDCARD [mm] "101-00313 SD SMD Push Type"
  rect 1x1.5 smd: 1(-6.1,-24.31) 2(-3.6,-24.31) 3(0,-24.31) 4(1.65,-24.31) 5(3.9,-24.31) 6(6.4,-24.31) 7(8.83,-24.31) 8(10.53,-24.31) 9(-8.6,-24.31) CD(-1.9,-24.31) WP(13.88,-24.31)
  rect 1.2x2 smd: GND(-13.6,-3.3) GND(14.4,-2.1)
  round 1.8 hole 1.5: ""(-11.3,0) ""(12.85,0)
  silkscreen extent -14.45,-23.1 15.4,5.4
SOIC127P600-14AM [mm] "SOIC, 14-Leads, Body 8.6x3.9mm, Pitch 1.27mm, IPC Low Density"
  oval 1.8x0.7 smd: 1(-2.8,3.81) 2(-2.8,2.54) 3(-2.8,1.27) 4(-2.8,0) 5(-2.8,-1.27) 6(-2.8,-2.54) 7(-2.8,-3.81) 8(2.8,-3.81) 9(2.8,-2.54) 10(2.8,-1.27) 11(2.8,0) 12(2.8,1.27) 13(2.8,2.54) 14(2.8,3.81)
  silkscreen extent -2.92,-4.4 1.5,4.84, body extent -2,-4.38 2,4.38, height 1.73
SOIC127P602-16BM [mm] "SOIC, 16-Leads, Body 9.9x3.9mm, Pitch 1.27mm, IPC Low Density"
  oval 1.8x0.7 smd: 1(-2.8,4.445) 2(-2.8,3.175) 3(-2.8,1.905) 4(-2.8,0.635) 5(-2.8,-0.635) 6(-2.8,-1.905) 7(-2.8,-3.175) 8(-2.8,-4.445) 9(2.8,-4.445) 10(2.8,-3.175) 11(2.8,-1.905) 12(2.8,-0.635) 13(2.8,0.635) 14(2.8,1.905) 15(2.8,3.175) 16(2.8,4.445)
  silkscreen extent -2.92,-5 1.5,5.47, body extent -2,-5 2,5, height 1.73
SOIC-SO28_N [mm] "SOIC, 28-Leads, Body 17.9x7.5mm, Pitch 1.27mm, IPC Medium Density"
  oval 2.3x0.6 smd: 1(-4.55,8.255) 2(-4.55,6.985) 3(-4.55,5.715) 4(-4.55,4.445) 5(-4.55,3.175) 6(-4.55,1.905) 7(-4.55,0.635) 8(-4.55,-0.635) 9(-4.55,-1.905) 10(-4.55,-3.175) 11(-4.55,-4.445) 12(-4.55,-5.715) 13(-4.55,-6.985) 14(-4.55,-8.255) 15(4.55,-8.255) 16(4.55,-6.985) 17(4.55,-5.715) 18(4.55,-4.445) 19(4.55,-3.175) 20(4.55,-1.905) 21(4.55,-0.635) 22(4.55,0.635) 23(4.55,1.905) 24(4.55,3.175) 25(4.55,4.445) 26(4.55,5.715) 27(4.55,6.985) 28(4.55,8.255)
  silkscreen extent -4.67,-9.05 3,9.23, body extent -3.8,-9.06 3.8,9.06, height 2.65
SOT23-3M [mm] "SOT23, 3-Leads, Body 2.9x1.3mm, Pitch 0.95mm, Lead Span 2.5mm, IPC Low Density"
  rect 1.8x0.6 smd: 1(-1,0.95) 2(-1,-0.95) 3(1,0)
  silkscreen extent 0.3,-1.5 0.7,1.5, body extent -0.7,-1.5 0.7,1.5, height 1.1
SOT95P230-3N [mm] "SOT23, 3-Leads, Body 2.9x1.3mm, Pitch 0.95mm, Lead Span 2.3mm - Alternate Lead Configuration, IPC Medium Density"
  rect 1.15x0.6 smd: 1(1.125,0) 2(-1.125,0.95) 3(-1.125,-0.95)
  silkscreen extent -0.2,-1.5 0.7,1.5, body extent -0.7,-1.5 0.7,1.5, height 1.1
TO220ABN [mm] "TO, Thru-Hole, Vertical, Heatsink Mounted; 3 In-Line Leads; Pitch 2.54 mm; Pin sequence 1, 3, 2"
  rect 1.7x1.7 hole 1.1: 1(-2.54,0)
  round 1.7 hole 1.1: 2(2.54,0) 3(0,0)
  silkscreen extent -5.2,-1.7 5.2,2.9

## Part data
C1 C2 C3 C4 C5 C9 C10 C12 C13 C18 C19: "Capacitor (Semiconductor SIM Model)"
C6 C7 C8 C11 C14 C15: "Capacitor"
C16 C17: "Polarized Capacitor (Radial)"
D1 D2 D3_IO1 D3_IO2: "1 Amp General Purpose Rectifier"
D5: library part "Diode 1N5404", "3 Amp General Purpose Rectifier"
J1 J5: library part mDIN9, "CUI Inc. MD-90S MINIDIN9 PCB Mount Socket"
J2: library part SDCard_SPI, "(101-00313) SD-Card Socket Surface Mount Amphenol Shouhmin Industry"
J3_IO1 J3_IO2 J4_IO1 J4_IO2: library part DIN5, "CUI Inc. SDS-50J DIN5 PCB Mount Socket"
J6: "CUI Inc. PJ-102B Low Voltage Power Supply Connector"
J7 J8: "Switchcraft RN-111PC Jack Socket, 1/4\" [6.5mm], Thru-Hole, 2-Conductor Open Circuit"
LED1 LED2 LED3 LED4 LED5 LED6 LED7 LED8: "5050 RGB LED"
P1: "Header, 16-Pin, Dual row"
P2 P3: "Header, 4-Pin, Dual row"
P4: "Header, 4-Pin"
Q1 Q2 Q3 Q4 Q5 Q6 Q7 Q8 Q9 Q10 Q11 Q22 Q23 Q24 Q25 Q26: "BC807 PNP General Purpose Amplifier"
Q12_NPNA Q12_NPNB Q12_NPNC Q13_NPNA Q13_NPNB Q13_NPNC Q14_NPNA Q14_NPNB Q14_NPNC Q15_NPNA Q15_NPNB Q15_NPNC Q16_NPNA Q16_NPNB Q16_NPNC Q17_NPNA Q17_NPNB Q17_NPNC Q18_NPNA Q18_NPNB Q18_NPNC Q19_NPNA Q19_NPNB Q19_NPNC Q20_IO1 Q20_IO2 Q21: "BC817/BC818 SMD NPN Bipolar Transistor"
R1_NPNA R1_NPNB R1_NPNC R2_NPNA R2_NPNB R2_NPNC R3_NPNA R3_NPNB R3_NPNC R4_NPNA R4_NPNB R4_NPNC R5_NPNA R5_NPNB R5_NPNC R6_NPNA R6_NPNB R6_NPNC R7_NPNA R7_NPNB R7_NPNC R8_NPNA R8_NPNB R8_NPNC R9_NPNA R9_NPNB R9_NPNC R10_NPNA R10_NPNB R10_NPNC R11_NPNA R11_NPNB R11_NPNC R12_NPNA R12_NPNB R12_NPNC R13_NPNA R13_NPNB R13_NPNC R14_NPNA R14_NPNB R14_NPNC R15_NPNA R15_NPNB R15_NPNC R16_NPNA R16_NPNB R16_NPNC R17_NPNA R17_NPNB R17_NPNC R18_NPNA R18_NPNB R18_NPNC R19_NPNA R19_NPNB R19_NPNC R20_NPNA R20_NPNB R20_NPNC R21_NPNA R21_NPNB R21_NPNC R22_NPNA R22_NPNB R22_NPNC R23_NPNA R23_NPNB R23_NPNC R24_NPNA R24_NPNB R24_NPNC R25 R26 R27 R28 R29 R30 R31 R32 R33 R34 R35 R36 R37 R38 R39 R40 R41 R42 R43 R44 R45 R46 R47 R48 R49 R50 R51 R52 R53 R54 R55 R56 R57 R58 R59 R60_IO1 R60_IO2 R61_IO1 R61_IO2 R62 R63_IO1 R63_IO2 R64_IO1 R64_IO2 R65_IO1 R65_IO2 R66 R67 R68 R69 R70 R71 R72 R73 R74 R75 R76 R77 R78 R79 R80 R81 R82 R83 R84 R85 R86 R87 R88 R89 R90 R91 R92 R93 R94 R95 R96: "Resistor"
U1 U8: library part SN54HC138J, "3-Line to 8-Line Decoder / Demultiplexer"
U2 U3 U4: "8-Bit Shift Register with 3-State Output Registers"
U5: "Three Terminal 3A-5V Positive Voltage Regulator"
U6: "High Speed General Purpose 16-Bit Flash Microcontroller, 64KB Flash, 8KB RAM, 28-Pin SOIC, Industrial Temperature"
U7_IO1 U7_IO2: "Optocoupler, Phototransistor Output, Dual Channel, TTL Compatible, Pb-free"
U9 U10: "8-Bit Parallel-Out Serial Shift Register"
U11: library part BTModule

## Free pads (board coordinates)
  round 1.524 smd: 0(-421.538,-21.844) 0(-421.538,-19.812) 0(-421.538,-17.78) 0(-421.31,-12.217) 0(-417.214,-14.649) 0(-414.799,-14.649) 0(-412.767,-14.649) 0(-410.735,-14.649) 0(-296.563,46.033) 0(-294.403,40.953) 0(-291.863,40.445)
  round 1.524 hole 0.762: 0(-421.234,-14.3) 1(-434.594,-31.369) 1(-434.594,-27.305) 1(-434.594,-23.241) 1(-434.594,-19.177) 1(-434.594,-15.113) 1(-421.657,-33.215) 1(-417.847,-33.215) 1(-414.037,-33.215) 1(-410.227,-33.215) 1(-406.417,-33.215) 1(-402.607,-33.215) 1(-398.797,-33.215) 1(-394.987,-33.215) 1(-391.177,-33.215) 1(-389.78,-67.759) 1(-387.367,-33.215) 1(-383.557,-33.215)
  round 6 hole 3: LCD_MNT(-314.982,13.14) LCD_MNT(-314.956,67.15) LCD_MNT(-227.986,67.14) LCD_MNT(-227.156,13.093) PCBMNT(-326.737,11.616) PCBMNT(-303.394,67.039) PCBMNT(-217.593,11.616) PCBMNT(-217.593,71.616) ""(-359.935,157.793) ""(-359.931,103.793) ""(-272.961,103.783) ""(-272.935,157.793)

## Via types
v1: diameter 0.6, hole 0.3, Top Layer to Bottom Layer, 234 vias

## Nets (pads, with @x,y where several pads share a name; then routed paths per layer and width w, separated by ;. In a path a pad name is that pad's centre, name@x,y a point inside that pad or via, vN(x,y) a via of type N, cw(c..) or ccw(c..) an arc to the next point about the centre after c; other vN are vias at no path point)
+3V3: C8.1 C10.2 C11.1 C12.2 C13.2 C18.2 C19.2 D2.2 J2.4 P1.23 P3.1 P3.3 R58.2 R59.2 R61_IO1.2 R61_IO2.2 R62.2 R78.2 R80.2 R81.1 U6.13 U6.28 U9.14 U10.14 U11.12 | length 302.8
  Top Layer w0.203: R59.2@-286.91,61.007 -286.402,61.515 -286.402,64.829 -286.033,65.198 -285.513,65.198 R61_IO1.2@-285.513,65.101 ; R62.2@-270.642,40.699 -269.152,39.209 -265.369,39.209 -264.908,39.67 -264.908,41.874 -264.554,42.228 -264.054,42.228 -263.7,41.874 -263.7,40.3 -263.29,39.89 -262.814,39.89 -262.43,40.274 -262.43,41.938 -262.018,42.35 -260.748,42.35 -260.494,42.096 U9.14@-260.494,41.074 -259.351,41.074 ; v1(-259.351,40.445) -259.351,41.074 ; C13.2@-259.097,42.031 -259.097,41.074 ; C18.2@-253.015,28.507 -252.939,28.507 -252.939,27.809 U10.14@-251.865,26.735 -252.063,26.537 -253.326,26.537 -256.174,29.385 ; R80.2@-244.13,28.253 -245.262,29.385 -256.174,29.385 ; -259.351,41.074 -259.097,41.074 ; -259.097,41.074 -258.722,41.074 -258.716,41.08 -258.716,31.927 -256.174,29.385
  Top Layer w0.254: J2.4@-301.081,46.667 -301.895,46.667 -302.404,47.176 -302.404,49.97 -302.15,50.224 -295.452,50.224 ; R59.2@-286.91,61.007 R58.2@-285.513,61.007 -279.857,61.007 -278.401,59.551 -273.906,59.551 U6.28@-273.851,59.495
  Top Layer w0.508: J2.4@-301.081,46.667 -299.544,46.667 C12.2@-299.356,46.479 -298.532,46.479 -297.832,45.779 -297.832,44.509 -298.23,44.111 -303.148,44.111 -304.055,45.017 -304.055,51.875 -303.293,52.637 -299.737,52.637 -298.721,53.653 -298.721,56.574 -299.229,57.082 -303.42,57.082 -305.833,54.669 -305.833,35.111 -305.071,34.349 -299.61,34.349 -299.61,36.381 -298.988,37.003 -289.463,37.003 -289.45,37.016 ; -294.688,49.46 -295.452,50.224 -295.952,50.724 -295.952,59.876 -294.821,61.007 R59.2@-286.91,61.007 ; R78.2@-289.821,31.105 -289.45,31.476 -289.45,37.016 ; R62.2@-270.642,40.699 -279.346,40.699 -280.54,39.505 -282.861,39.505 -283.654,40.298 -288.815,40.298 -289.027,40.086 -289.035,40.086 -289.42,39.701 -289.42,37.046 -289.45,37.016 ; v1(-257.065,46.922) -255.795,46.922 ; R61_IO2.2@-254.664,54.542 -254.664,53.26 -255.795,52.129 -255.795,50.478 ; C19.2@-254.652,47.492 -255.222,46.922 -255.795,46.922 ; U11.12@-252.92,50.5 -253.019,50.401 -254.652,50.401 -255.717,50.401 -255.795,50.478 ; -255.795,46.922 -255.795,50.478
  Top Layer w0.635: -294.688,49.46 -293.851,48.623 -288.257,48.623 -288.053,48.827 ; C11.1@-286.529,44.676 -286.529,46.287 -288.053,47.811 ; C10.2@-285.702,51.367 -285.702,51.683 -286.783,52.764 -287.926,52.764 -288.053,52.637 -288.053,48.827 ; U6.13@-282.951,44.255 -286.91,44.255 -288.053,45.398 -288.053,47.811 ; -288.053,47.811 -288.053,48.827
  Top Layer w0.762: U6.28@-273.851,59.495 v1(-271.963,59.495)
  Bottom Layer w0.254: P1.23@-288.18,38.159 -287.322,38.159 -286.226,39.255 -286.226,44.373 C11.1@-286.529,44.676
  Bottom Layer w0.508: -257.954,46.922 v1(-257.065,46.922)
  Bottom Layer w0.635: P3.3@-260.875,54.923 -259.555,53.603 -259.555,49.338 -257.968,47.751 -257.954,47.751
  Bottom Layer w0.762: v1(-271.963,59.495) -269.931,57.463 P3.1@-260.875,57.463 P3.3@-260.875,54.923 ; v1(-259.351,40.445) -257.954,40.445
  Bottom Layer w1.27: -257.954,47.751 -257.954,46.922 -257.954,40.445 -257.954,38.464 C8.1@-255.541,36.051 -255.541,35.361 D2.2@-251.669,31.489
A: J1.1 J5.1 pad.0@-410.735,-14.649 U1.1 U6.3 U8.1 | length 103.6
  Top Layer w0.254: pad.0@-410.735,-14.649 -410.657,-14.649 -409.389,-15.917 ; U8.1@-409.389,-17.943 -409.389,-15.917 ; J1.1@-389.922,-19.998 -389.922,-19.993 -391.895,-18.02 U1.1@-397.705,-18.02 -397.705,-14.978 -398.416,-14.266 -407.738,-14.266 -409.389,-15.917 ; v1(-324.375,79.053) -324.375,78.164 v1(-323.867,77.656) ; U6.3@-282.951,56.955 v1(-280.814,56.955)
  Bottom Layer w0.203: J5.1@-324.629,82.618 -324.375,82.364 v1(-324.375,79.053)
  Bottom Layer w0.254: v1(-323.867,77.656) -325.046,76.477 -325.046,62.829 -323.549,61.332 -292.661,61.332 -291.837,60.508 -291.837,57.819 -287.123,53.104 -282.506,53.104 -280.814,54.796 v1(-280.814,56.955)